# Altium PCB 110-00315-D_B1-DevKit.PcbDoc (part 2 of 9)
Units mil, origin at the board's own origin, x right, y up, seen from the top; angles counter-clockwise.
Board outline 5199.57 x 2702 mil, 8 copper layers (Top Layer, Layer 2-GND-Plane, Layer 3, Layer 4, Layer 5, Layer 6, Layer 7-PWR-Plane, Bottom Layer), stack 60.866 mil thick; 418 components, 298 nets, 1591 pads, 1631 vias.
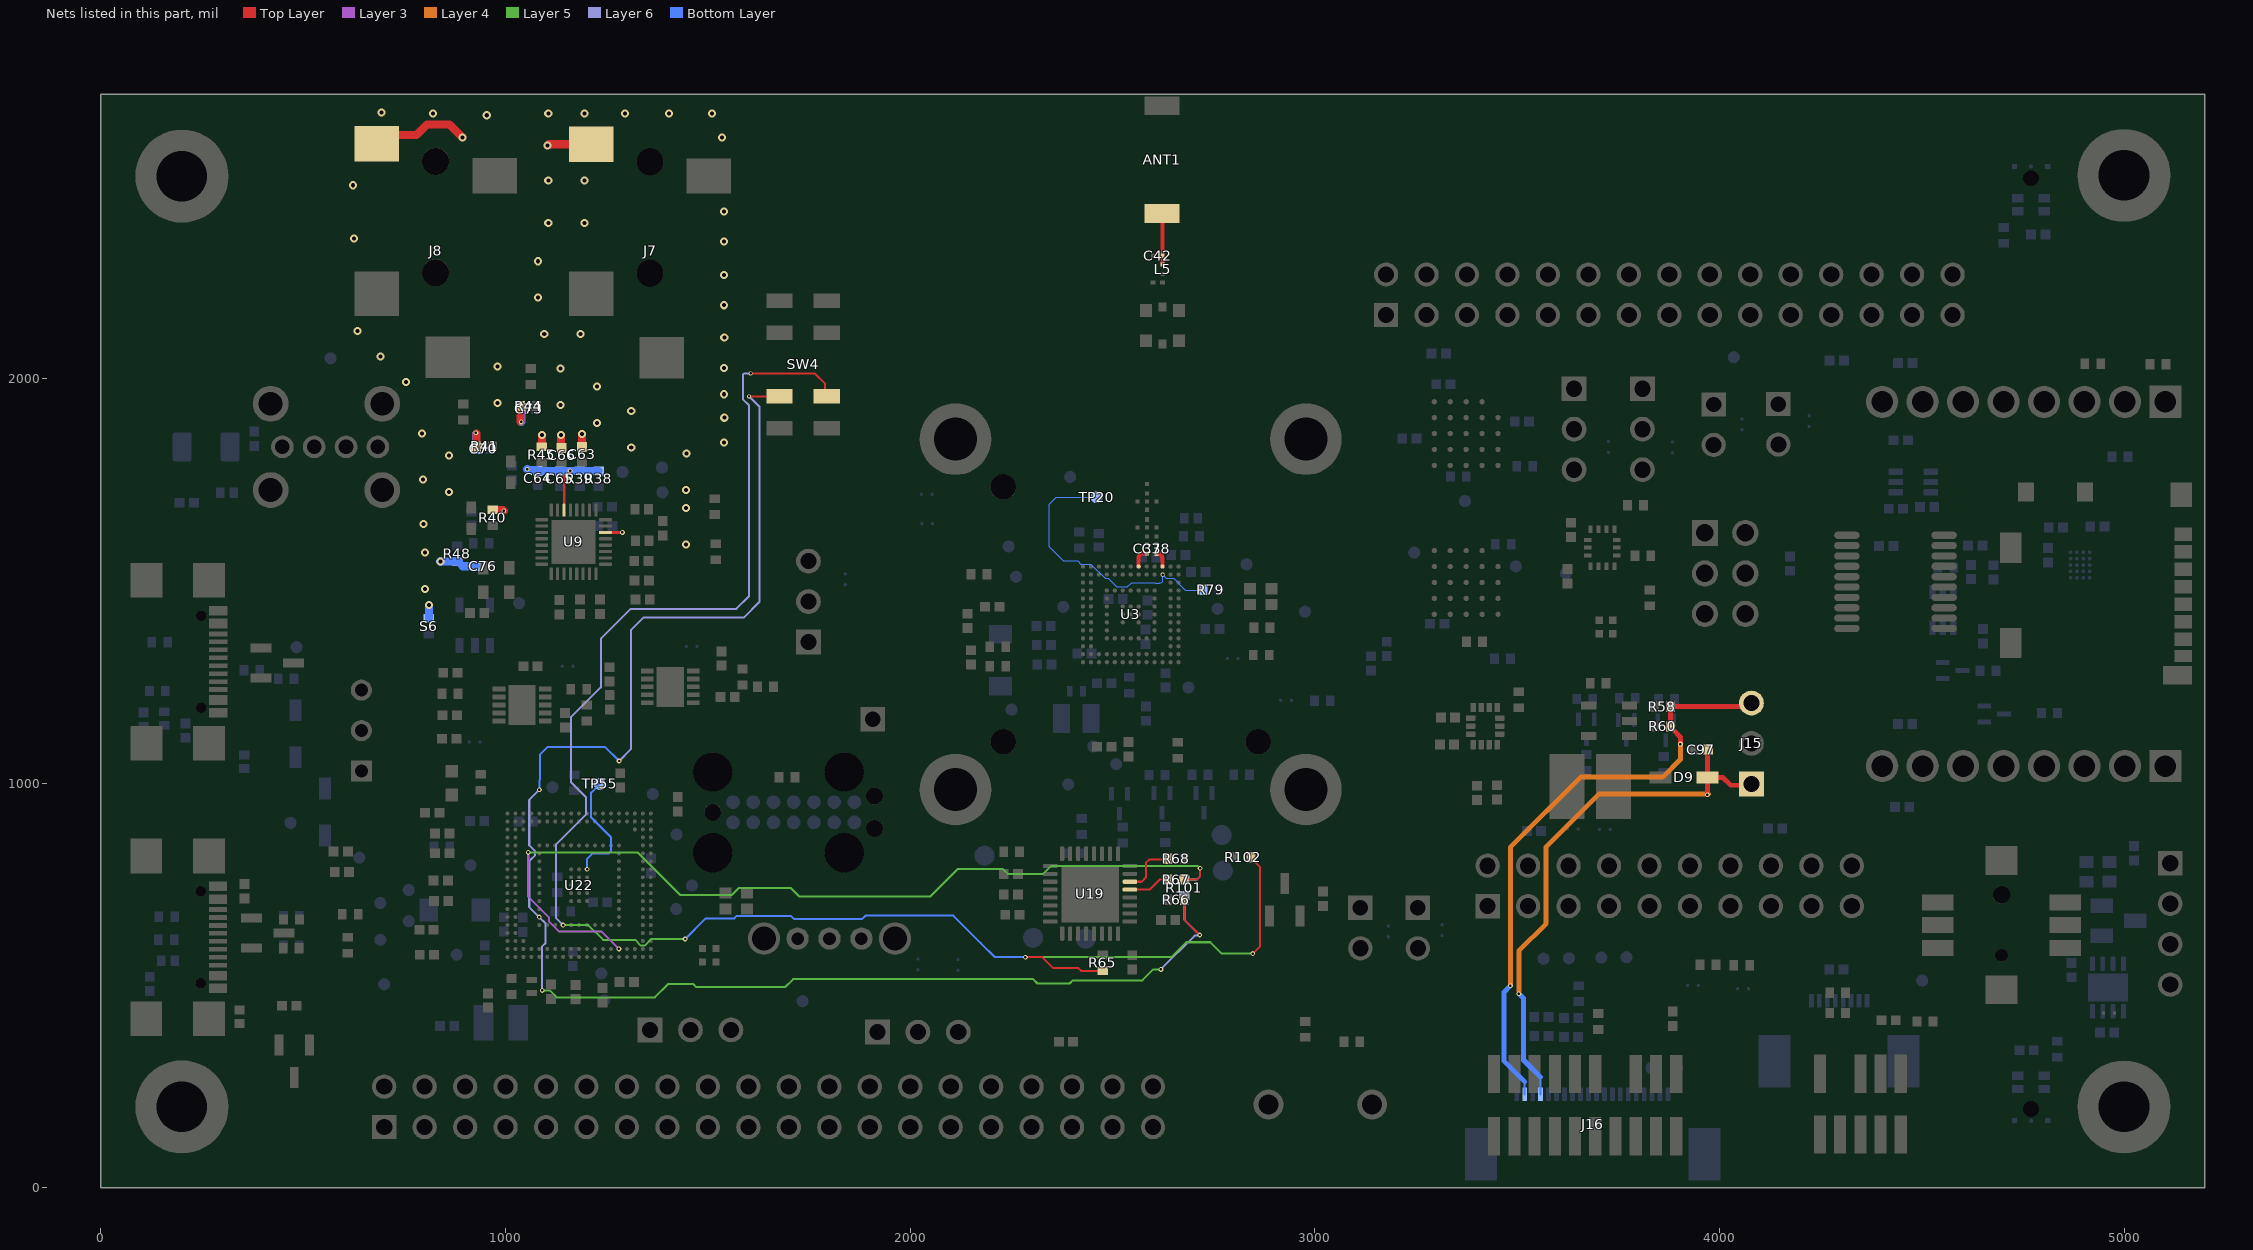
[diagram p8: the nets of this part, all layers, seen from the top]

## Footprints (in the part's own frame and the unit in brackets; to place one, negate y for a bottom-side part, rotate by r counter-clockwise, add the part's x,y. Pads: shape width x height; smd on the part's side, far side on the other; paste and mask are expansions set on the pad) (continued)
MIC_T5838#1 [mil]
  round 39 / inner round 0 / far side round 30 hole 39 unplated mask+4: 0(0,0)
  rect 20.55x28.54 smd: 1(-81.65,-32.99) 2(-49.29,-32.99) 6(-49.29,32.99) 7(-81.65,32.99)
  round 10 smd paste-2 mask+0: 3(29.54,-0.41)
  rect 13x13 smd: 4(29,-41) 5(29,41)
  Top Layer circle w12: c0,0 r30
  Top Layer lines w5: -8.34,-25.68 cw(c0,0) -25.68,-8.34 ; 8.34,-25.68 ccw(c0,0) 25.68,-8.34 ; -25.68,8.34 cw(c0,0) -8.34,25.68 ; 25.68,8.34 ccw(c0,0) 8.34,25.68
  silkscreen extent -103,-70 49,58, body extent -97,-52 41,52, height 38
MIC_T5838#2 [mil]
  round 39 / inner round 0 / far side round 30 hole 39 unplated mask+4: 0(0,0)
  rect 20.55x28.54 smd: 1(-81.65,-32.99) 2(-49.29,-32.99) 6(-49.29,32.99) 7(-81.65,32.99)
  round 10 smd paste-2 mask+0: 3(29.54,-0.41)
  rect 13x13 smd: 4(29,-41) 5(29,41)
  Top Layer lines w5: 8.34,25.68 cw(c0,0) 25.68,8.34 ; -8.34,25.68 ccw(c0,0) -25.68,8.34 ; 25.68,-8.34 cw(c0,0) 8.34,-25.68 ; -25.68,-8.34 ccw(c0,0) -8.34,-25.68
  Top Layer lines w12: 30,-0.41 cw(c0,0) 0,-30 cw(c0,0) 30,-0.41
  silkscreen extent -103,-70 49,58, body extent -97,-52 41,52, height 38
OSC_4p_2016_XRCGB38M400F2P00R0 [mm]
  rect 0.7x0.75 smd: 1(-0.5,0.675) 2(-0.5,-0.675) 3(0.5,-0.675) 4(0.5,0.675)
  silkscreen extent -0.91,-0.1 0.91,1.37, body extent -0.8,-1 0.8,1, height 0.7
OSC_4P_3225_1210_uChip_DSC1001DL5 [mm]
  rect 0.85x0.65 smd: 1(-0.775,0.825) 2(-0.775,-0.825) 3(0.775,-0.825) 4(0.775,0.825)
  silkscreen extent -1.14,-0.3 1.14,1.48, body extent -1.02,-1.24 1.02,1.24, height 0.94
PAD_RF10x10#1 [mil] "SMD Ghost Pad, 10mil^2"
  rect 10x10 smd: 1(0,0.3)
PAD_RF10x10#2 [mil] "SMD Ghost Pad, 10mil^2"
  rect 10x10 smd: 1(0,0)
PQFN50P250X300X88-14N [mm]
  rrect25% 0.59x0.35 smd: 1(-1.165,0.75) 2(-1.165,0.25) 3(-1.165,-0.25) 4(-1.165,-0.75) 8(1.165,-0.75) 9(1.165,-0.25) 10(1.165,0.25) 11(1.165,0.75)
  rrect25% 0.35x0.59 smd: 5(-0.5,-0.915) 6(0,-0.915) 7(0.5,-0.915) 12(0.5,0.915) 13(0,0.915) 14(-0.5,0.915)
  silkscreen extent -2.1,-1.25 1.5,1.25, body extent -1.5,-1.25 1.5,1.25, height 0.88
QFN32_5x5x1-0p5_INF-M_no3D [mil]
  rrect50% 36x10 smd paste+0: 1(-98.5,68.9) 2(-98.5,49.21) 3(-98.5,29.53) 4(-98.5,9.84) 5(-98.5,-9.84) 6(-98.5,-29.53) 7(-98.5,-49.21) 8(-98.5,-68.9) 17(98.5,-68.9) 18(98.5,-49.21) 19(98.5,-29.53) 20(98.5,-9.84) 21(98.5,9.84) 22(98.5,29.53) 23(98.5,49.21) 24(98.5,68.9)
  rrect50% 10x36 smd paste+0: 9(-68.9,-98.5) 10(-49.21,-98.5) 11(-29.53,-98.5) 12(-9.84,-98.5) 13(9.84,-98.5) 14(29.53,-98.5) 15(49.21,-98.5) 16(68.9,-98.5) 25(68.9,98.5) 26(49.21,98.5) 27(29.53,98.5) 28(9.84,98.5) 29(-9.84,98.5) 30(-29.53,98.5) 31(-49.21,98.5) 32(-68.9,98.5)
  rect 142x142 smd paste-70.5 mask+0: 33(0,0)
  silkscreen extent -140,-106 106,106
QFN40P400X400X80-33N [mm]
  rrect50% 0.8x0.2 smd: 1(-2,1.4) 2(-2,1) 3(-2,0.6) 4(-2,0.2) 5(-2,-0.2) 6(-2,-0.6) 7(-2,-1) 8(-2,-1.4) 17(2,-1.4) 18(2,-1) 19(2,-0.6) 20(2,-0.2) 21(2,0.2) 22(2,0.6) 23(2,1) 24(2,1.4)
  rrect50% 0.2x0.8 smd: 9(-1.4,-2) 10(-1,-2) 11(-0.6,-2) 12(-0.2,-2) 13(0.2,-2) 14(0.6,-2) 15(1,-2) 16(1.4,-2) 25(1.4,2) 26(1,2) 27(0.6,2) 28(0.2,2) 29(-0.2,2) 30(-0.6,2) 31(-1,2) 32(-1.4,2)
  rect 2.75x2.75 smd: 33(0,0)
  silkscreen extent -2.82,-2.18 2.21,2.21, body extent -2.05,-2.05 2.05,2.05, height 0.8
RC0201_RF10 [mil] "SMD Multilayer Ceramic Resistor body 0.60x0.30mm, 10mil wide pad"
  rect 10x10 smd: 1(-11.81,0) 2(11.81,0)
  silkscreen extent 0,-5 0,5, body extent -12,-5 12,5, height 13
RESC0402-01 [mm] "Chip Resistor, Body 1.0x0.5mm, IPC Medium Density"
  rect 0.55x0.65 smd: 1(-0.5,0) 2(0.5,0)
  silkscreen extent -0.51,-0.51 0.51,0.51, body extent -0.52,-0.27 0.53,0.28, height 0.4
RESC0603-01 [mil]
  rect 28.94x33.94 smd: 1(-24.23,0) 2(24.23,0)
  silkscreen extent -20,-25 20,25, body extent -31,-17 31,17, height 20
RESC3216X125N_1206 [mm]
  rrect25% 1.2x1.82 smd: 1(-1.505,0) 2(1.505,0)
  silkscreen extent -1.63,-1.09 1.63,1.09, body extent -1.52,-0.84 1.54,0.84, height 1.65
RHDR8W80P0X254_1X8_2082X254X850P [mm]
  rect 2.025x2.025 hole 1.35: 1(0,0)
  round 2.025 hole 1.35: 2(2.54,0) 3(5.08,0) 4(7.62,0) 5(10.16,0) 6(12.7,0) 7(15.24,0) 8(17.78,0)
  silkscreen extent -1.78,-1.52 19.65,1.46, body extent -1.49,-1.19 19.33,1.35, height 8.5
SAMTEC_FTSH-105-01-DV-007-K [mm]
  rect 0.76x2.4 smd: 1(-2.54,-1.905) 2(-2.54,1.905) 3(-1.27,-1.905) 4(-1.27,1.905) 5(0,-1.905) 6(0,1.905) 8(1.27,1.905) 9(2.54,-1.905) 10(2.54,1.905)
  silkscreen extent -6.6,-4.02 6.6,3, body extent -3.14,-2.92 3.14,2.92, height 6.12
SAMTEC_FTSH-110-01-X-DV-007-K [mm]
  rect 0.76x2.4 smd: 1(-5.715,-1.95) 2(-5.715,1.95) 3(-4.445,-1.95) 4(-4.445,1.95) 5(-3.175,-1.95) 6(-3.175,1.95) 8(-1.905,1.95) 9(-0.635,-1.95) 10(-0.635,1.95) 11(0.635,-1.95) 12(0.635,1.95) 13(1.905,-1.95) 14(1.905,1.95) 15(3.175,-1.95) 16(3.175,1.95) 17(4.445,-1.95) 18(4.445,1.95) 19(5.715,-1.95) 20(5.715,1.95)
  silkscreen extent -9.7,-4.02 9.6,3, body extent -6.35,-2.92 6.35,2.92, height 6.1
SC75_SSM_TOS-L [mm]
  rect 0.3x0.856 smd paste+0: 1(-0.5,-0.624) 2(0.5,-0.624) 3(0,0.624)
  silkscreen extent -0.93,-0.61 0.93,0.53, body extent -0.8,-0.8 0.8,0.8, height 0.75
SOD123F_NXP [mil]
  rect 54x30 smd paste+0 mask+4: 1(-58,0) 2(58,0)
  silkscreen extent -85,-38 58,38, body extent -71,-34 71,34, height 47
Solderbridge_Shorted#1 [mm]
  round 0.2 smd paste-10: 1(-0.338,0) 2(0.338,0)
  Top Layer region: -0.102,-0.432 -0.178,-0.505 -0.296,-0.467 -0.361,-0.424 -0.434,-0.351 -0.488,-0.292 -0.546,-0.193 -0.574,-0.099 -0.569,0.122 -0.544,0.193 -0.46,0.33 -0.376,0.411 -0.284,0.469 -0.183,0.5 -0.132,0.483 -0.102,0.43
  Top Layer region: 0.102,0.432 0.178,0.505 0.296,0.467 0.361,0.424 0.434,0.351 0.488,0.292 0.546,0.193 0.574,0.099 0.569,-0.122 0.544,-0.193 0.46,-0.33 0.376,-0.411 0.284,-0.469 0.183,-0.5 0.132,-0.483 0.102,-0.43
  Top Layer lines w0.152: -0.178,0.431 ccw(c-0.068,0) -0.178,-0.431 ; 0.178,0.431 cw(c0.068,0) 0.178,-0.431
  Top Layer lines w0.203: -0.338,0 0.338,0
  silkscreen extent -0.71,-0.71 0.71,0.71
Solderbridge_Shorted#2 [mm]
  round 0.2 smd paste-10: 1(-0.338,0) 2(0.338,0)
  Top Layer region: 0.102,0.432 0.178,0.505 0.296,0.467 0.361,0.424 0.434,0.351 0.488,0.292 0.546,0.193 0.574,0.099 0.569,-0.122 0.544,-0.193 0.46,-0.33 0.376,-0.411 0.284,-0.469 0.183,-0.5 0.132,-0.483 0.102,-0.43
  Top Layer region: -0.102,-0.432 -0.178,-0.505 -0.296,-0.467 -0.361,-0.424 -0.434,-0.351 -0.488,-0.292 -0.546,-0.193 -0.574,-0.099 -0.569,0.122 -0.544,0.193 -0.46,0.33 -0.376,0.411 -0.284,0.469 -0.183,0.5 -0.132,0.483 -0.102,0.43
  Top Layer lines w0.152: 0.178,0.431 cw(c0.068,0) 0.178,-0.431
  Top Layer lines w0.203: 0.338,0 -0.338,0
  silkscreen extent -0.71,-0.71 0.71,0.71
SOT363_DIO [mil]
  rect 35.5x16 smd paste+0 mask+0: 1(-44.25,25.59) 2(-44.25,0) 3(-44.25,-25.59) 4(44.25,-25.59) 5(44.25,0) 6(44.25,25.59)
  silkscreen extent -65,-48 32,55, body extent -48,-44 48,44, height 43
SOT363_TI [mm] "6-TSSOP, SC-88, SOT-363"
  rrect25% 0.9x0.4 smd paste+0 mask+0: 1(-1.1,0.65) 2(-1.1,0) 3(-1.1,-0.65) 4(1.1,-0.65) 5(1.1,0) 6(1.1,0.65)
  silkscreen extent -2.03,-1.17 0.63,1.17, body extent -1.05,-1 1.05,1, height 1.1
SOT-23_DBZ_TEX [mil]
  rect 22x52 smd paste+0 mask+0: 1(-37.4,-40) 2(37.4,-40) 3(0,40)
  silkscreen extent -65,-33 65,33, body extent -60,-52 60,52, height 44
SW_1825966-TL1107-1 [mm]
  round 1.875 hole 1.25: 1(-3.25,0) 2(3.25,0)
  silkscreen extent -3,-1.75 3,1.75, body extent -3.9,-1.78 4,1.72, height 4.7
SW_450301014042_WRE [mil]
  round 52 / inner round 60 / far side round 52 hole 32 paste-99999 mask+0: 1(0,-100) 2(0,-200)
  rect 52x52 / inner round 60 / far side rect 52x52 hole 32 paste-99999 mask+0: 3(0,0)
  silkscreen extent -75,-302 54,102, body extent -50,-297 48,97, height 252
SW_CL-SB-23A-01_NDC-M [mil]
  rect 65x36 smd paste+0: 1(-58.5,157.48) 2(-58.5,78.74) 3(-58.5,-78.74) 4(-58.5,-157.48) 5(58.5,157.48) 6(58.5,78.74) 7(58.5,-78.74) 8(58.5,-157.48)
  silkscreen extent -114,-260 74,260, body extent -69,-236 69,236, height 217
SW_JS1400BFQ [mm]
  rect 2x1 smd: 1(-4,1.425) 2(-4,0) 3(-4,-1.425) 4(4,1.425) 5(4,0) 6(4,-1.425)
  rect 2x1.8 smd: SH1(0,4.05) SH2(0,-4.05)
  round 0.8 hole 0.8 unplated: ""(0,1.9)
  round 1.1 hole 1.1 unplated: ""(0,-1.9)
  silkscreen extent -3.85,-3.7 3.85,3.7, body extent -4.5,-3.9 4.5,3.9, height 4.99
SW_SPDT_OS10201MSQN1 [mil] "Switch, SPDT slide, PCB vertical, 5 pin"
  round 55 hole 31: 1(-79,0) 2(0,0) 3(79,0)
  round 80 hole 59: 4(-162,0) 5(162,0)
  silkscreen extent -177,-109 176,90, body extent -168,-86 170,84, height 353
TC2070-IDC [mil]
  round 34 smd paste-42: 1(-150,-25) 2(-100,-25) 3(-50,-25) 4(0,-25) 5(50,-25) 6(100,-25) 7(150,-25) 8(150,25) 9(100,25) 10(50,25) 11(0,25) 12(-50,25) 13(-100,25) 14(-150,25)
  round 96.5 hole 96.5 unplated: 15(-200,100) 17(-200,-100) 18(125,-100) 21(125,100)
  round 42 hole 42 unplated: 16(-200,0) 19(200,-39.96) 20(200,39.96)
  silkscreen extent -249,-102 245,98
TP_30_RND [mil]
  round 30 smd paste-15: 1(0,0)
  silkscreen extent -22,-22 22,22
TP_50_RND [mil]
  round 50 smd paste-25: 1(0,0)
  silkscreen extent -32,-32 32,32
TSOT23-5_ONS [mil]
  rect 37.5x20 smd paste+0 mask+4: 1(-50.25,37.4) 2(-50.25,0) 3(-50.25,-37.4) 4(50.25,-37.4) 5(50.25,37.4)
  silkscreen extent -65,-62 37,75, body extent -55,-57 55,57, height 39
TSSOP20_TI_PW0020A_M [mm]
  oval 1.6x0.45 smd paste+0 mask+0.051: 1(-3.05,2.925) 2(-3.05,2.275) 3(-3.05,1.625) 4(-3.05,0.975) 5(-3.05,0.325) 6(-3.05,-0.325) 7(-3.05,-0.975) 8(-3.05,-1.625) 9(-3.05,-2.275) 10(-3.05,-2.925) 11(3.05,-2.925) 12(3.05,-2.275) 13(3.05,-1.625) 14(3.05,-0.975) 15(3.05,-0.325) 16(3.05,0.325) 17(3.05,0.975) 18(3.05,1.625) 19(3.05,2.275) 20(3.05,2.925)
  silkscreen extent -4.44,-3.43 1.92,3.45, body extent -3.2,-3.25 3.2,3.25, height 1.2
UDFN3030-10_SON50P300X300X63-11N [mm] "Diodes Inc U-DFN3030-10"
  rect 0.8x0.3 smd: 1(-1.45,1) 2(-1.45,0.5) 3(-1.45,0) 4(-1.45,-0.5) 5(-1.45,-1) 6(1.45,-1) 7(1.45,-0.5) 8(1.45,0) 9(1.45,0.5) 10(1.45,1)
  rect 1.7x2.5 smd: 11(0,0)
  silkscreen extent -2.11,-1.63 1.5,1.63, body extent -1.55,-1.5 1.55,1.5, height 0.63
WE-TVS_SOT23-3L [mm] "TVS Diode, package SOT23-3L"
  rect 0.9x1.4 smd: 1(-0.95,-1.05) 2(0.95,-1.05) 3(0,1.05)
  silkscreen extent -1.45,-0.65 1.45,0.65, body extent -1.45,-1.2 1.45,1.2, height 1.04
WLCSP20_NVT4857_NXP [mil]
  round 9 smd paste+0 mask+0: A1(-23.62,31.5) A2(-7.87,31.5) A3(7.87,31.5) A4(23.62,31.5) B1(-23.62,15.75) B2(-7.87,15.75) B3(7.87,15.75) B4(23.62,15.75) C1(-23.62,0) C2(-7.87,0) C3(7.87,0) C4(23.62,0) D1(-23.62,-15.75) D2(-7.87,-15.75) D3(7.87,-15.75) D4(23.62,-15.75) E1(-23.62,-31.5) E2(-7.87,-31.5) E3(7.87,-31.5) E4(23.62,-31.5)
  silkscreen extent -56,-47 39,47, body extent -34,-42 34,42, height 21
XTAL_ABS07_ABR-M [mil]
  rect 46x57 smd paste+0: 1(-64,0) 2(64,0)
  silkscreen extent -29,-33 29,33, body extent -65,-27 65,27, height 35

## Part data
ANT1: library part ANT_2450AT43A100, "Antenna, Chip, 2.4GHz Bluetooth, ISM, Wi-Fi,  2.7dBi", Manufacturer 1=Johanson, Manufacturer Part Number 1=2450AT43A0100001E, Package=None, Check_prices=https://www.snapeda.com/parts/ACAG0201-2450-T/Abracon+LLC/view-part/?ref=eda, SnapEDA_Link=https://www.snapeda.com/parts/ACAG0201-2450-T/Abracon+LLC/view-part/?ref=snap
C1 C3 C8 C9 C14 C18 C20 C27 C28 C31 C32 C71 C72 C75 C110 C120 C123 C130 C135 C136 C137 C138 C140 C141 C142: "Cap,1.0uF,20%,25V,X5R,0402", Manufacturer 1=TDK, Manufacturer 2=Yageo, Manufacturer 3=Murata, Manufacturer Part Number 1=CGB2A1X5R1E105K033BC, Manufacturer Part Number 2=CC0402KRX5R8BB105, Manufacturer Part Number 3=GRM155R61E105KA12D, Tolerance=10%, Voltage=25V, LatestRevisionDate=17-Jul-2002, LatestRevisionNote="Re-released for DXP Platform.", Max_Height=0.60mm, PackageDescription="Radial Cap, Thru-Hole; 2 Leads; 0.3 in Pin Spacing", PackageReference=RAD-0.3, PCB_Footprint=CC0402, Published=8-Jun-2000, Publisher="Altium Limited", Type=X5R
C2 C7 C13 C34: "Cap,10nF,10%,50V,X7R,0402", Manufacturer 1=TDK, Manufacturer 2=Samsung, Manufacturer 3=Walsin, Manufacturer Part Number 1=CGA2B3X7R1H103K050BE, Manufacturer Part Number 2=CL05B103KB5NNNC, Manufacturer Part Number 3=0402B103K500CT, Tolerance=10%, Voltage=50V, LatestRevisionDate=17-Jul-2002, LatestRevisionNote="Re-released for DXP Platform.", Max_Height=0.60mm, PackageDescription="Radial Cap, Thru-Hole; 2 Leads; 0.3 in Pin Spacing", PackageReference=RAD-0.3, PCB_Footprint=CC0402, Published=8-Jun-2000, Publisher="Altium Limited", Type=X7R
C4 C10 C17 C19 C43 C76 C96 C99 C121 C144: "Cap,10uF,20%,10V,X5R,0402", Manufacturer 1=AVX, Manufacturer 2=Samsung, Manufacturer 3=Venkel, Manufacturer Part Number 1=0402ZD106MAT2A, Manufacturer Part Number 2=CL05A106MP5NUNC, Manufacturer Part Number 3=C0402X5R100-106MNP, Tolerance=10%, Voltage=10V, LatestRevisionDate=17-Jul-2002, LatestRevisionNote="Re-released for DXP Platform.", Max_Height=0.60mm, PackageDescription="Radial Cap, Thru-Hole; 2 Leads; 0.3 in Pin Spacing", PackageReference=RAD-0.3, PCB_Footprint=CC0402, Published=8-Jun-2000, Publisher="Altium Limited", Type=X5R
C5 C11: "Cap,680pF,5%,50V,C0G,0402", Manufacturer 1=TDK, Manufacturer 2=Samsung, Manufacturer 3=Walsin, Manufacturer Part Number 1=CGA2B2NP01H681J050BA, Manufacturer Part Number 2=CL05C681JB5NNNC, Manufacturer Part Number 3=0402N681J500CT, Tolerance=5%, Voltage=50V, LatestRevisionDate=17-Jul-2002, LatestRevisionNote="Re-released for DXP Platform.", Max_Height=0.60mm, PackageDescription="Radial Cap, Thru-Hole; 2 Leads; 0.3 in Pin Spacing", PackageReference=RAD-0.3, PCB_Footprint=CC0402, Published=8-Jun-2000, Publisher="Altium Limited", Type=C0G
C6 C12 C24 C53 C54 C59 C67 C68 C85 C94 C100 C103 C113 C116 C119: "Cap,2.2uF,20%,25V,X5R,0402", Manufacturer 1=TDK, Manufacturer 2=Murata, Manufacturer Part Number 1=C1005X5R1E225M050BC, Manufacturer Part Number 2=GRM155R61E225ME11D, Manufacturer Part Number 3=GRM155R61E225ME15D, Tolerance=20%, Voltage=25V, LatestRevisionDate=17-Jul-2002, LatestRevisionNote="Re-released for DXP Platform.", Manufacturer 3=Murata, Max_Height=0.60mm, PackageDescription="Radial Cap, Thru-Hole; 2 Leads; 0.3 in Pin Spacing", PackageReference=RAD-0.3, PCB_Footprint=CC0402, Published=8-Jun-2000, Publisher="Altium Limited", Type=X5R
C21 C22 C25 C26 C29 C30 C33 C44 C45 C46 C47 C48 C49 C50 C51 C52 C55 C56 C57 C61 C62 C64 C77 C78 C79 C80 C81 C82 C83 C84 C87 C88 C89 C90 C91 C92 C93 C98 C101 C102 C111 C112 C114 C115 C117 C118 C122 C124 C125 C126 C127 C128 C129 C131 C132 C133 C134 C139 C143: "Cap,100nF,10%,50V,X7R,0402", Manufacturer 1=TDK, Manufacturer 2=Samsung, Manufacturer 3=Walsin, Manufacturer Part Number 1=C1005X7R1H104K050BE, Manufacturer Part Number 2=CL05B104KB54PNC, Manufacturer Part Number 3=0402B104K500CT, Tolerance=10%, Voltage=50V, LatestRevisionDate=17-Jul-2002, LatestRevisionNote="Re-released for DXP Platform.", Max_Height=0.60mm, PackageDescription="Radial Cap, Thru-Hole; 2 Leads; 0.3 in Pin Spacing", PackageReference=RAD-0.3, PCB_Footprint=CC0402, Published=8-Jun-2000, Publisher="Altium Limited", Type=X7R
C23 C106: "DNI,Cap,1.0uF,20%,25V,X5R,0402", Manufacturer 1=TDK, Manufacturer 2=Yageo, Manufacturer 3=Murata, Manufacturer Part Number 1=CGB2A1X5R1E105K033BC, Manufacturer Part Number 2=CC0402KRX5R8BB105, Manufacturer Part Number 3=GRM155R61E105KA12D, Tolerance=10%, Voltage=25V, LatestRevisionDate=17-Jul-2002, LatestRevisionNote="Re-released for DXP Platform.", Max_Height=0.60mm, PackageDescription="Radial Cap, Thru-Hole; 2 Leads; 0.3 in Pin Spacing", PackageReference=RAD-0.3, PCB_Footprint=CC0402, Published=8-Jun-2000, Publisher="Altium Limited", Type=X5R
C37: library part Cap_SMT, "Cap,4.0pF,+-0.05pF,>=25V,C0G,0201", Manufacturer 1=MuRata, Manufacturer 2=Kemet, Manufacturer Part Number 1=GJM0335C1E4R0WB01D, Manufacturer Part Number 2=CBR02C409A5GAC, Tolerance=0p05, Voltage=25V, LatestRevisionDate=17-Jul-2002, LatestRevisionNote="Re-released for DXP Platform.", Max_Height=0.60mm, PackageDescription="Radial Cap, Thru-Hole; 2 Leads; 0.3 in Pin Spacing", PackageReference=RAD-0.3, PCB_Footprint=0201, Published=8-Jun-2000, Publisher="Altium Limited", Type=C0G
C38: library part Cap_SMT, "Cap,16pF,1%,50V,C0G,0201", Manufacturer 1=MuRata, Manufacturer 2=Kemet, Manufacturer Part Number 1=GCM0335C1H160FA16J, Manufacturer Part Number 2=CBR02C160F8GAC, Tolerance=1%, Voltage=25V, LatestRevisionDate=17-Jul-2002, LatestRevisionNote="Re-released for DXP Platform.", Max_Height=0.60mm, PackageDescription="Radial Cap, Thru-Hole; 2 Leads; 0.3 in Pin Spacing", PackageReference=RAD-0.3, PCB_Footprint=0201, Published=8-Jun-2000, Publisher="Altium Limited", Type=C0G
C39: library part Cap_SMT, "Cap,2.2pF,+-0.05pF,>25V,C0G,0201", Manufacturer 1=MuRata, Manufacturer 2=Kemet, Manufacturer Part Number 1=GJM0335C1E2R2WB01D, Manufacturer Part Number 2=CBR02C229A5GAC, Tolerance=0p05, Voltage=25V, LatestRevisionDate=17-Jul-2002, LatestRevisionNote="Re-released for DXP Platform.", Max_Height=0.60mm, PackageDescription="Radial Cap, Thru-Hole; 2 Leads; 0.3 in Pin Spacing", PackageReference=RAD-0.3, PCB_Footprint=0201, Published=8-Jun-2000, Publisher="Altium Limited", Type=C0G
C40: library part Cap_SMT, "Cap,2.0pF,+-0.05pF,>25V,C0G,0201", Manufacturer 1=MuRata, Manufacturer 2=Yageo, Manufacturer Part Number 1=GJM0335C1E2R0WB01D, Manufacturer Part Number 2=CQ0201ARNPO9BN2R0, Tolerance=0p05, Voltage=25V, LatestRevisionDate=17-Jul-2002, LatestRevisionNote="Re-released for DXP Platform.", Max_Height=0.60mm, PackageDescription="Radial Cap, Thru-Hole; 2 Leads; 0.3 in Pin Spacing", PackageReference=RAD-0.3, PCB_Footprint=0201, Published=8-Jun-2000, Publisher="Altium Limited", Type=C0G
C41: "Ind,13nH,+-3%,>300mA,ESR < 800mOhm,SRF >4.3GHz,Q >12 @ 500MHz,0201", Manufacturer 1=MuRata, Manufacturer 3=Abracon, Manufacturer Part Number 1=LQP03TN13NH02D, Manufacturer Part Number 2=LQP03HQ13NH02D, Manufacturer Part Number 3=AIMC-Q0201HQ-13NH-T, RMS_Current=250mA, Tolerance=3%, Code_IEC=0201, Code_JEITA=0201, DCR=800m, LatestRevisionDate=29-May-2009, LatestRevisionNote="IPC-7351 Footprint Added.", Manufacturer 2=MuRata, Max_Height=0.45mm, PackageDescription="Chip Inductor", PackageReference=0402-A, PCB_Footprint=0201, Published=8-Jun-2000, Publisher="Altium Limited"
C42: library part Cap_SMT, "DNI,Cap,tbd,tbd,>25V,C0G,0201", Tolerance=tbd, Voltage=25V, LatestRevisionDate=17-Jul-2002, LatestRevisionNote="Re-released for DXP Platform.", Max_Height=0.60mm, PackageDescription="Radial Cap, Thru-Hole; 2 Leads; 0.3 in Pin Spacing", PackageReference=RAD-0.3, PCB_Footprint=0201, Published=8-Jun-2000, Publisher="Altium Limited", Type=C0G
C58: "Cap,100pF,5%,25V,C0G,Hi-Q,0402", Manufacturer 1=Kemet, Manufacturer 3=Walsin, Manufacturer Part Number 1=CBR04C101J3GAC, Manufacturer Part Number 2=CBR04C101G3GAC, Manufacturer Part Number 3=RF15N101J250CT, Tolerance=5%, Voltage=25V, LatestRevisionDate=17-Jul-2002, LatestRevisionNote="Re-released for DXP Platform.", Manufacturer 2=Kemet, Max_Height=0.60mm, PackageDescription="Radial Cap, Thru-Hole; 2 Leads; 0.3 in Pin Spacing", PackageReference=RAD-0.3, PCB_Footprint=CC0402, Published=8-Jun-2000, Publisher="Altium Limited", Type=C0G
C60 C63 C65 C66 C86: library part Cap_225M25VX5R0402_1, "Cap,4.7uF,20%,10V,X5R,0402", Manufacturer 1=TDK, Manufacturer 2=Kyocera, Manufacturer 3=Samsung, Manufacturer Part Number 1=C1005X5R1A475K050BC, Manufacturer Part Number 2=0402YD475MAT2A, Manufacturer Part Number 3=CL05A475MP5NRNC, Tolerance=20%, Voltage=10V, LatestRevisionDate=17-Jul-2002, LatestRevisionNote="Re-released for DXP Platform.", Max_Height=0.60mm, PackageDescription="Radial Cap, Thru-Hole; 2 Leads; 0.3 in Pin Spacing", PackageReference=RAD-0.3, PCB_Footprint=CC0402, Published=8-Jun-2000, Publisher="Altium Limited", Type=X5R
C69 C74: "Cap, Tant, 10uF, 6V3-10V, 10%-20%, 0603", Case Size/Dimension=T0603, Lifetime@Temperature=4000Hrs@105degC, Manufacturer 1=Kyocera, Manufacturer 3=Vishay, Manufacturer Part Number 1=TACL106M010XTA, Manufacturer Part Number 3=298D106X06R3M2T, Operating Temp Range=-40to+105degC, Ripple Current=1650mA, Impedance=0.03O, Manufacturer 2=Kyocera, Manufacturer Part Number 2=TACL106M010XTA, Type=Radial
C70 C73: "Cap,220pF,5%,50V,C0G,0402", Manufacturer 1=MuRata, Manufacturer 2=Kemet, Manufacturer 3=TDK, Manufacturer Part Number 1=GRM1555C1H221JA01D, Manufacturer Part Number 2=C0402C221J5GACTU, Manufacturer Part Number 3=C1005C0G1H221J050BA, Tolerance=5%, Voltage=50V, LatestRevisionDate=17-Jul-2002, LatestRevisionNote="Re-released for DXP Platform.", Max_Height=0.60mm, PackageDescription="Radial Cap, Thru-Hole; 2 Leads; 0.3 in Pin Spacing", PackageReference=RAD-0.3, PCB_Footprint=CC0402, Published=8-Jun-2000, Publisher="Altium Limited", Type=C0G
C95: "Cap,4.7nF,10%,100V,X7R,0402", Manufacturer 1=MuRata, Manufacturer 2=Wurth, Manufacturer 3=Vishay, Manufacturer Part Number 1=GCM155R72A472KA37D, Manufacturer Part Number 2=885012205084, Manufacturer Part Number 3=VJ0402Y472KXBAC, Tolerance=10%, Voltage=100V, LatestRevisionDate=17-Jul-2002, LatestRevisionNote="Re-released for DXP Platform.", Max_Height=0.60mm, PackageDescription="Radial Cap, Thru-Hole; 2 Leads; 0.3 in Pin Spacing", PackageReference=RAD-0.3, PCB_Footprint=CC0402, Published=8-Jun-2000, Publisher="Altium Limited", Type=X7R
C97: "Cap,470nF,20%,50V,X5R,0402", Manufacturer 1=MuRata, Manufacturer 2=Cal-Chip, Manufacturer Part Number 1=GRM155R61H474ME11D, Manufacturer Part Number 2=GMC04X5R474M50NT, Tolerance=20%, Voltage=50V, LatestRevisionDate=17-Jul-2002, LatestRevisionNote="Re-released for DXP Platform.", Max_Height=0.60mm, PackageDescription="Radial Cap, Thru-Hole; 2 Leads; 0.3 in Pin Spacing", PackageReference=RAD-0.3, PCB_Footprint=CC0402, Published=8-Jun-2000, Publisher="Altium Limited", Type=X7R
C104 C108 C109: "DNI,Cap,100nF,10%,50V,X7R,0402", Manufacturer 1=TDK, Manufacturer 2=Samsung, Manufacturer 3=Walsin, Manufacturer Part Number 1=C1005X7R1H104K050BE, Manufacturer Part Number 2=CL05B104KB54PNC, Manufacturer Part Number 3=0402B104K500CT, Tolerance=10%, Voltage=50V, LatestRevisionDate=17-Jul-2002, LatestRevisionNote="Re-released for DXP Platform.", Max_Height=0.60mm, PackageDescription="Radial Cap, Thru-Hole; 2 Leads; 0.3 in Pin Spacing", PackageReference=RAD-0.3, PCB_Footprint=CC0402, Published=8-Jun-2000, Publisher="Altium Limited", Type=X7R
C105 C107: library part Cap_225M25VX5R0402_1, "DNI,Cap,4.7uF,20%,10V,X5R,0402", Manufacturer 1=TDK, Manufacturer 2=Kyocera, Manufacturer 3=Samsung, Manufacturer Part Number 1=C1005X5R1A475K050BC, Manufacturer Part Number 2=0402YD475MAT2A, Manufacturer Part Number 3=CL05A475MP5NRNC, Tolerance=20%, Voltage=10V, LatestRevisionDate=17-Jul-2002, LatestRevisionNote="Re-released for DXP Platform.", Max_Height=0.60mm, PackageDescription="Radial Cap, Thru-Hole; 2 Leads; 0.3 in Pin Spacing", PackageReference=RAD-0.3, PCB_Footprint=CC0402, Published=8-Jun-2000, Publisher="Altium Limited", Type=X5R
D1 D3: library part "D Zener_2_ComA", "Diode,Zener,Dual,Common Anode", Manufacturer 1=Nexpheria, Manufacturer Part Number 1=PESD2USB5UX-TR, Manufacturer Part Number 2=PESD2USB5UXT-QR, Code_JEDEC=SOT23-3, LatestRevisionDate=17-Jul-2002, LatestRevisionNote="Re-released for DXP Platform.", Manufacturer 2=Nexpheria, PackageDescription=SOT23-3, PackageReference=SOT23-3, Published=8-Jun-2000, Publisher="Altium Limited"
D2 D10: library part "D LED_RGB_CA_1MMc1MM", "Diode,LED,RGB, (@2mA) -> R=10mcd & 1.75V, G = 50mcd & 2.75V, B = 20mcd & 2.95V, 0404(1mm x 1mm)", Manufacturer 1=Lumex, LatestRevisionDate=17-Jul-2002, LatestRevisionNote="Re-released for DXP Platform.", Manufacturer Part Number 1=SML-LX0404SIUPGUSB, PackageDescription="SM LED; 2 Flat Leads", PackageReference=1.0x1.0, PackageVersion=Feb-2002, Published=8-Jun-2000, Publisher="Altium Limited"
D4 D5 D9: "Diode,Schottky,1A,40V,SOD123", Manufacturer 1=ST, Manufacturer 2=Panjit, Manufacturer 3=Nexpheria, Manufacturer Part Number 1=STPS140ZY, Manufacturer Part Number 2=SBA140AS_R1_00001, Manufacturer Part Number 3=PMEG4010EH,115, Code_JEDEC=SOD123, LatestRevisionDate=17-Jul-2002, LatestRevisionNote="Re-released for DXP Platform.", PackageDescription=SOD123, PackageReference=SOD123, Published=8-Jun-2000, Publisher="Altium Limited"
D6: "Diode,LED,Green 573nm,300mcd @ 20mA,0603", Manufacturer 1=Wurth, Manufacturer Part Number 1=150060VS86000, LatestRevisionDate=17-Jul-2002, LatestRevisionNote="Re-released for DXP Platform.", PackageDescription="SM LED; 2 Flat Leads", PackageReference=L0603, PackageVersion=Feb-2002, Published=8-Jun-2000, Publisher="Altium Limited"
D8: library part D_ESD_ESD2CAN24DBZRQ1, "Diode,TVS  – High Speed Series, SOT23-3, 2 Channel, 24Vdc, 12pF", Manufacturer 1=TI, Manufacturer 2=Nexpheria, Manufacturer Part Number 1=ESD2CAN24DBZRQ1, Manufacturer Part Number 2=PESD2CAN24T-QR
F1: library part Fuse_PTC_0ZCJ0050FF2G, "Fuse,Poly PTC,1A,8V,150mOhm,1206", Manufacturer 1=Belfuse, Copyright="Copyright (C) 2022 Ultra Librarian. All rights reserved.", Digi-Key_Part_Number_1=507-1802-1-ND, Digi-Key_Part_Number_2=507-1802-2-ND, Digi-Key_Part_Number_3=507-1802-6-ND, Manufacturer Part Number 1=0ZCJ0050FF2G, Manufacturer_Part_Number=0ZCJ0050FF2G, Mfr_Name=Belfuse, RefDes=RefDes
FB1 FB2 FB3 FB4 FB5 FB10 FB11 FB12: "Ind,WidebandChoke,1.5A,120ohm@100MHz,95mOhm,0402", Manufacturer 1=Murata, Manufacturer Part Number 1=BLM15EG121SN1D, RMS_Current=1.5A, Tolerance=30%, Code_IEC=1005, Code_JEITA=0402, DCR=143m, Impedance=120@100M, LatestRevisionDate=29-May-2009, LatestRevisionNote="IPC-7351 Footprint Added.", Max_Height=0.60mm, PackageDescription="Chip Inductor", PackageReference=0402-A, PCB_Footprint=0402, Published=8-Jun-2000, Publisher="Altium Limited"
FB8: "DNI,Ind,WidebandChoke,1.5A,120ohm@100MHz,95mOhm,0402", Manufacturer 1=Murata, Manufacturer Part Number 1=BLM15EG121SN1D, RMS_Current=1.5A, Tolerance=30%, Code_IEC=1005, Code_JEITA=0402, DCR=143m, Impedance=120@100M, LatestRevisionDate=29-May-2009, LatestRevisionNote="IPC-7351 Footprint Added.", Max_Height=0.60mm, PackageDescription="Chip Inductor", PackageReference=0402-A, PCB_Footprint=0402, Published=8-Jun-2000, Publisher="Altium Limited"
FB9 R23 R86: "Res,10R0,1%,100ppm,0402", Manufacturer 1=Vishay, Manufacturer 2=KOA, Manufacturer 3=Stackpol, Manufacturer Part Number 1=CRCW040210R0FKED, Manufacturer Part Number 2=RK73H1ETTP10R0F, Manufacturer Part Number 3=RMCF0402FT10R0, Tolerance=1%, LatestRevisionDate=29-May-2009, LatestRevisionNote="IPC-7351 Footprint Added.", PackageDescription="Chip Resistor", PackageReference=RESC0402-01, PCB_Footprint=RESC0402-01, Published=8-Jun-2000, Publisher="Altium Limited", Type="Thick Film", Wattage=63mW
H1 H2 H3 H4: "Hole, #4,--not a BOM item--", PCB_Footprint=TP_PAD1
J1: library part Conn_1-1734775-1, "Conn,USB 2.0, Type A Recept,4 Pos, R/A", Manufacturer 1="TE Connectivity", Copyright="Copyright (C) 2022 Ultra Librarian. All rights reserved.", Digi-Key_Part_Number_1=A108852-ND, Manufacturer Part Number 1=1-1734775-1, Manufacturer_Part_Number=1-1734775-1, Mfr_Name="TE Connectivity", RefDes=RefDes, Type=DEV
J2 J3: library part CONN_USB_C_SMT_USB4110GFA, "CONN,USB-C, USB 2.0 Receptacle Connector 24 (16+8 Dummy) Position Surface Mount, Right Angle", Manufacturer 1=GCT, Manufacturer 2=Linkplex, Manufacturer Part Number 2=LUB-C123D-007-G-19, Package=None, Manufacturer Part Number 1=USB4110GFA, SnapEDA_Link=https://www.snapeda.com/parts/USB4110GFA/Global+Connector+Technology/view-part/?ref=snap
J5: library part CONN_U.FL_SWITCH_MM8130-2600, "Conn,U.FL, Switch, Male Pin 50Ohm 6-Pin SMT", Manufacturer 1=MyRata, Manufacturer Part Number 1=MM8130-2600R, Datasheet Link=https://www.te.com/commerce/DocumentDelivery/DDEController?Action=showdoc&DocId=Customer+Drawing%7F2081956%7FA%7Fpdf%7FEnglish%7FENG_CD_2081956_A.pdf%7F2081956-1, Height=1.05mm
J6: library part "Conn_SD_Molex CN-SD-8-2SW-2S", "Conn,Micro SD Card w/ switch, RA, 8-Pin SMD", Current Rating=500mA, Manufacturer 1=Molex, Package Description="8-Pin Surface Mount Device, Body 11.95 x 11.4 mm, Pitch 1.1 mm", voltage rating=10VAC/DC, Brand=Molex, Card Type=microSD, Contact Material=PhosphorBronze, Contact Plating=Gold, Datasheet URL=http://www.molex.com/pdm_docs/sd/1040310811_sd.pdf, Datasheet Version="Rev. E, 04/2006", Height=1.42mm, Housing Material=LiquidCrystalPolymer(LCP), Insertion - Extraction Style=Push-Pull, Length=11.4mm, Manufacturer Part Number 1=104031-0811, Manufacturer URL=http://www.molex.com/, Mating Cycles=10000, Mounting Technology=SurfaceMount, Mounting Type=Standard, Number of Contacts=8, Number of Rows=1Row, Orientation=RightAngle, Package Reference=104031-0811, Packaging=Reel, Pitch=1.1mm, Product=CardConnectors, Product Category=MemoryCardConnectors, RoHS=True, Termination Style=SMD
J7: library part CONN_SJ-3524-SMT-TR-XX, "Conn, Audio Jack, 3.5 mm Low Profile Surface Mount Stereo Jack, 3 Pin Right-Angle, XX = color GREEN", Color=GREEN, Manufacturer 1=CUI, Mfr_Name="CUI Devices", Manufacturer Part Number 1=SJ-3524-SMT-TR-GR, RefDes=RefDes, Type=Type
J8: library part CONN_SJ-3524-SMT-TR-XX, "Conn, Audio Jack, 3.5 mm Low Profile Surface Mount Stereo Jack, 3 Pin Right-Angle, XX = color BLUE", Color=BLUE, Manufacturer 1=CUI, Mfr_Name="CUI Devices", Manufacturer Part Number 1=SJ-3524-SMT-TR-BE, RefDes=RefDes, Type=Type
J9: library part Hdr_M_2X10_2M54_STRT_UNSHROUDED, "Hdr, Male,2x10, 0.1\"x0.1\", Strt,Mate Ht 0.318\",Tail Ht 0.120\",Unshrouded", Manufacturer 1=Sullins, Manufacturer Part Number 1=PRPC010DFAN-RC
J10: library part Hdr_M_2X20_2M54_STRT_UNSHROUDED, "Hdr, Male,2x20, 0.1\"x0.1\", Strt,Mate Ht 0.318\",Tail Ht 0.120\",Unshrouded", Manufacturer 1=Sullins, Manufacturer Part Number 1=PRPC020DFAN-RC, PCB_Footprint=HDR,2x20,2M54,STRT,UNSHROUD
J11: library part Hdr_M_2X15_2M54_STRT_UNSHROUDED, "Hdr, Male,2x15, 0.1\"x0.1\", Strt,Mate Ht 0.318\",Tail Ht 0.120\",Unshrouded", Manufacturer 1=Sullins, Manufacturer Part Number 1=PRPC015DFAN-RC
J12: "Hdr,Male,2x10,1.27mm,Strt,Keyed,Cortex-JTAG", Manufacturer 1=Samtec, Manufacturer Part Number 1=FTSH-110-01-L-DV-007-K, PCB_Footprint=FTSH-110-01-X-DV-007-K
J13: "Hdr,Male,2x5,1.27mm,Strt,Keyed,Cortex-JTAG", Manufacturer 1=Samtec, Manufacturer Part Number 1=FTSH-105-01-L-DV-007-K, PCB_Footprint=FTSH-105-01-L-DV-007-K
J14: library part Hdr_M_1X4_2M54_STRT_UNSHROUD, "Hdr, 0.025\" SQ Post Header, Thru-hole, Vertical, 2.54 mm Pitch, 4-Pin, Male, RoHS", Manufacturer=Samtec, Manufacturer Part Number 1=TSW-104-07-G-S, Temperature Range="-55 to 125 degC", ComponentLink1Description="Manufacturer URL", ComponentLink1URL=http://www.samtec.com, ComponentLink2Description=Datasheet, ComponentLink2URL=http://www.samtec.com/documents/webfiles/pdf/TSW_TH.PDF, ComponentLink3Description="Package Specification", ComponentLink3URL=http://www.samtec.com/documents/webfiles/cpdf/TSW-XXX-XX-XXX-X-XX-XXX-MKT.pdf, DatasheetVersion=F-214, Manufacturer 1=Samtec, Mounting Technology=Through-hole, Orientation=Vertical, PackageDescription=".025[0.64] SQ. Post Terminal Strip Assembly", PackageVersion="DM, 8/1988", Pitch="2.54 mm", RoHS=True
J15 JP3 JP6 JP7: library part Hdr_M_1X3_2M54_STRT_UNSHROUD, "DNI,Hdr, 0.025\" SQ Post Header, Through-hole, Vertical, -55 to 125 degC, 2.54 mm Pitch, 3-Pin, Male, RoHS", Manufacturer=Samtec, Manufacturer 2=Sullins, Manufacturer 3=3M, Manufacturer Part Number 2=PRPC003SAAN-RC, Manufacturer Part Number 3=929647-01-03-I, Temperature Range="-55 to 125 degC", ComponentLink1Description="Manufacturer URL", ComponentLink1URL=http://www.samtec.com, ComponentLink2Description=Datasheet, ComponentLink2URL=http://www.samtec.com/documents/webfiles/pdf/TSW_TH.PDF, ComponentLink3Description="Package Specification", ComponentLink3URL=http://www.samtec.com/documents/webfiles/cpdf/TSW-XXX-XX-XXX-X-XX-XXX-MKT.pdf, DatasheetVersion=F-214, Manufacturer 1=Samtec, Manufacturer Part Number 1=TSW-103-07-G-S, Mounting Technology=Through-hole, Orientation=Vertical, PackageDescription=".025[0.64] SQ. Post Terminal Strip Assembly", PackageReference=TSW-103-07-X-S, PackageVersion="DM, 8/1988", PartNumber=TSW-103-07-G-S, Pitch="2.54 mm", RoHS=True
J16: library part Conn_FFC_BOT_SLIDEorLOCK_0.50_20pin, "Conn,FlatFlex,20 pin,0.50mm,bottom-entry,slide-flap,SMT", Manufacturer 1=HiRose, Manufacturer 3=Molex, Manufacturer Part Number 2=FH52-20S-0.5SH(99), Manufacturer Part Number 3=5051102091, Copyright="Copyright (C) 2022 Ultra Librarian. All rights reserved.", Manufacturer 2=HiRose, Manufacturer Part Number 1=FH52-20S-0.5SH, RefDes=RefDes, Type=DEV
J17: library part Conn_FFC_BOT_SLIDorLOCK_0.50_8pin, "Conn,FlatFlex,8 pin,0.50mm,bottom-entry,slide-flap,SMT", Manufacturer 1=HiRose, Manufacturer Part Number 1=FH52E-8S-0.5SH(99), Manufacturer Part Number 2=FH52-8S-0.5SH(99), Mfr_Name=Omron, Copyright="Copyright (C) 2022 Ultra Librarian. All rights reserved.", Manufacturer 2=HiRose, RefDes=RefDes, Type=DEV
J19 J20: "Hdr,Female,1x8,2.54mm,Strt,Unshrouded", Manufacturer 1=Sullins, Manufacturer Part Number 1=PPPC081LFBN-RC
J21: library part Hdr_M_1X3_2M54_STRT_UNSHROUD, "Hdr, 0.025\" SQ Post Header, Through-hole, Vertical, -55 to 125 degC, 2.54 mm Pitch, 3-Pin, Male, RoHS", Manufacturer=Samtec, Manufacturer 2=Sullins, Manufacturer 3=3M, Manufacturer Part Number 1=TSW-103-07-L-S, Manufacturer Part Number 2=PRPC003SAAN-RC, Manufacturer Part Number 3=929647-01-03-I, Temperature Range="-55 to 125 degC", ComponentLink1Description="Manufacturer URL", ComponentLink1URL=http://www.samtec.com, ComponentLink2Description=Datasheet, ComponentLink2URL=http://www.samtec.com/documents/webfiles/pdf/TSW_TH.PDF, ComponentLink3Description="Package Specification", ComponentLink3URL=http://www.samtec.com/documents/webfiles/cpdf/TSW-XXX-XX-XXX-X-XX-XXX-MKT.pdf, DatasheetVersion=F-214, Manufacturer 1=Samtec, Mounting Technology=Through-hole, Orientation=Vertical, PackageDescription=".025[0.64] SQ. Post Terminal Strip Assembly", PackageVersion="DM, 8/1988", Pitch="2.54 mm", RoHS=True
J22: "Test Point, Array, Alignment Pins, SMT Pad,--not a BOM item--", PCB_Footprint=TC2070-IDC
J23: library part Hdr_M_1X3_2M54_STRT_UNSHROUD, "DNI, Hdr, 0.025\" SQ Post Header, Through-hole, Vertical, -55 to 125 degC, 2.54 mm Pitch, 3-Pin, Male, RoHS", Manufacturer=Samtec, Manufacturer 2=Sullins, Manufacturer 3=3M, Manufacturer Part Number 1=TSW-103-07-L-S, Manufacturer Part Number 2=PRPC003SAAN-RC, Manufacturer Part Number 3=929647-01-03-I, Temperature Range="-55 to 125 degC", ComponentLink1Description="Manufacturer URL", ComponentLink1URL=http://www.samtec.com, ComponentLink2Description=Datasheet, ComponentLink2URL=http://www.samtec.com/documents/webfiles/pdf/TSW_TH.PDF, ComponentLink3Description="Package Specification", ComponentLink3URL=http://www.samtec.com/documents/webfiles/cpdf/TSW-XXX-XX-XXX-X-XX-XXX-MKT.pdf, DatasheetVersion=F-214, Manufacturer 1=Samtec, Mounting Technology=Through-hole, Orientation=Vertical, PackageDescription=".025[0.64] SQ. Post Terminal Strip Assembly", PackageVersion="DM, 8/1988", Pitch="2.54 mm", RoHS=True
JP1 JP2 JP4 JP5: library part Hdr_M_1X2_2M54_STRT_UNSHROUD, "DNI,Hdr, 0.025\" SQ Post Header, Through-hole, Vertical, -55 to 125 degC, 2.54 mm Pitch, 2-Pin, Male, RoHS", Manufacturer=Samtec, Manufacturer 2=Amphenol, Manufacturer Part Number 1=TSW-102-07-L-S, Manufacturer Part Number 2=77311-102-02LF, Temperature Range="-55 to 125 degC", ComponentLink1Description="Manufacturer URL", ComponentLink1URL=http://www.samtec.com, ComponentLink2Description=Datasheet, ComponentLink2URL=http://www.samtec.com/documents/webfiles/pdf/TSW_TH.PDF, ComponentLink3Description="Package Specification", ComponentLink3URL=http://www.samtec.com/documents/webfiles/cpdf/TSW-XXX-XX-XXX-X-XX-XXX-MKT.pdf, DatasheetVersion=F-214, Manufacturer 1=Samtec, Mounting Technology=Through-hole, Orientation=Vertical, PackageDescription=".025[0.64] SQ. Post Terminal Strip Assembly", PackageVersion="DM, 8/1988", Pitch="2.54 mm", RoHS=True
JP9: library part Hdr_M_2X3_2M54_STRT_UNSHROUDED, "Hdr, Male,2x3, 2.54mm,0.230mate,0.100-0.120post,, Strt", Manufacturer 1=Samtec, Manufacturer Part Number 1=TSW-103-07-L-D
L1 L7: "Ind,Unshielded,8.2nH,<5%,1.5A,<70mOhm, SRF > 4GHz, 0402", Manufacturer 1=Delta, Manufacturer 2=MuRata, Manufacturer 3=CoilCraft, Manufacturer Part Number 1=0402HP-8N2EGTS, Manufacturer Part Number 2=LQW15AN8N2G80D, Manufacturer Part Number 3=0402DC-8N2XGRW, RMS_Current=1A5, Tolerance=5%, Code_IEC=0402, Code_JEITA=0402, DCR=70m, LatestRevisionDate=29-May-2009, LatestRevisionNote="IPC-7351 Footprint Added.", Max_Height=0.70mm, PackageDescription="Chip Inductor", PackageReference=0402, PCB_Footprint=0402, Published=8-Jun-2000, Publisher="Altium Limited"
L2: "Ind,Shielded,Metal Comp,2.2uH,20%,1.8A,<140mOhm,0806(2016)", Manufacturer 1=Samsung, Manufacturer 2=Littlefuse, Manufacturer Part Number 1=CIGT201610LH2R2MNE, Manufacturer Part Number 2=LPWI201610H2R2T, RMS_Current=1A8, Tolerance=20%, Code_IEC=2520, Code_JEITA=2520, DCR=140m, LatestRevisionDate=29-May-2009, LatestRevisionNote="IPC-7351 Footprint Added.", Max_Height=0.60mm, PackageDescription="Chip Inductor", PackageReference=L1008, PCB_Footprint=0806, Published=8-Jun-2000, Publisher="Altium Limited"
L3: "Ind,2.3nH,+-0.1nH,>500mA,ESR < 250mOhm,SRF >7GHz,Q >20 @ 500MHz,0201", Manufacturer 1=MuRata, Manufacturer 2=TDK, Manufacturer Part Number 1=LQP03HQ2N3B02D, Manufacturer Part Number 2=MHQ0603P2N3BT000, RMS_Current=500mA, Tolerance=0n1, Code_IEC=0201, Code_JEITA=0201, DCR=170m, LatestRevisionDate=29-May-2009, LatestRevisionNote="IPC-7351 Footprint Added.", Max_Height=0.45mm, PackageDescription="Chip Inductor", PackageReference=0402-A, PCB_Footprint=0201, Published=8-Jun-2000, Publisher="Altium Limited"
L4 R52: "Res,0R ohm,Jumper,0201", Manufacturer 1=KOA, Manufacturer 2=Stackpol, Manufacturer 3=Panasonic, Manufacturer Part Number 1=RK73Z1HTTC, Manufacturer Part Number 2=RMCF0201ZT0R00, Manufacturer Part Number 3=ERJ-1GN0R00C, Tolerance=1%, LatestRevisionDate=29-May-2009, LatestRevisionNote="IPC-7351 Footprint Added.", PackageDescription="Chip Resistor", PackageReference=0201, PCB_Footprint=0201, Published=8-Jun-2000, Publisher="Altium Limited", Type="Thick Film", Wattage=50mW
L5: library part Cap_SMT, "Cap,1.2pF,<+-0.10pF,25-50V,C0G,0201", Manufacturer 1=MuRata, Manufacturer 2=Kemet, Manufacturer 3=Kyosera, Manufacturer Part Number 1=GJM0335C1E1R2BB01D, Manufacturer Part Number 2=CBR02C129B3GAC, Manufacturer Part Number 3=CU01311R2BAT2A, Tolerance=0p1, Voltage=50V, LatestRevisionDate=17-Jul-2002, LatestRevisionNote="Re-released for DXP Platform.", Max_Height=0.60mm, PackageDescription="Radial Cap, Thru-Hole; 2 Leads; 0.3 in Pin Spacing", PackageReference=RAD-0.3, PCB_Footprint=0201, Published=8-Jun-2000, Publisher="Altium Limited", Type=C0G
L6: "Ind,Shielded,4.7uH,20%,1.7A,900mOhm,4x4x2mm", Manufacturer 1=Vishay, Manufacturer 2=Yageo, Manufacturer 3=Abracon, Manufacturer Part Number 1=IFSC1515AHER4R7M01, Manufacturer Part Number 2=BWVS004040184R7M00, Manufacturer Part Number 3=ASPI-0418FS-4R7-T3, RMS_Current=1A7, Tolerance=20%, Code_IEC=4x4x2mm, Code_JEITA=4x4x2mm, DCR=90m, LatestRevisionDate=29-May-2009, LatestRevisionNote="IPC-7351 Footprint Added.", Max_Height=0.60mm, PackageDescription=4x4x2mm, PackageReference=4x4x2mm, PCB_Footprint=4x4x2mm, Published=8-Jun-2000, Publisher="Altium Limited"
L8: "Ind,Unshielded,2.2uH,20%,2.3A,85mOhm,1008(2520)", Manufacturer 1=MuRata, Manufacturer 2="Pulse Eng", Manufacturer 3=Vishay, Manufacturer Part Number 1=DFE252012F-2R2M=P2, Manufacturer Part Number 2=BDHE002520122R2MQ1, Manufacturer Part Number 3=IHHP1008ABER2R2M01, RMS_Current=2.3A, Tolerance=20%, Code_IEC=2520, Code_JEITA=2520, DCR=85m, LatestRevisionDate=29-May-2009, LatestRevisionNote="IPC-7351 Footprint Added.", Max_Height=0.60mm, PackageDescription="Chip Inductor", PackageReference=L1008, PCB_Footprint=L1008, Published=8-Jun-2000, Publisher="Altium Limited"
PD1 PD2: library part PAD_0101, "Test Point, SMT Pad,--not a BOM item--", PCB_Footprint=TP_PAD10x10
Q1 Q2 Q3 Q4 Q5 Q6 Q7 Q8: "MOSFET,N-CH,20V,250mA,1.1Ohm,SOT-23", Manufacturer 1=Toshiba, Manufacturer 2=Rohm, Manufacturer Part Number 1=SSM3K35AFS, Manufacturer Part Number 2=RUE002N02TL, ComponentLink1Description="Manufacturer Link", ComponentLink1URL=http://www.irf.com/, DatasheetVersion=PD-9.814, LatestRevisionDate=17-Jul-2002, LatestRevisionNote="Re-released for DXP Platform.", Note="Pin 2 is electrically connected to pin 4.", PackageDescription="TO, Thru-Hole, Vertical, Heatsink Mounted; 3 In-Line Leads; Pitch 2.54 mm", PackageReference=TO-220AB, PackageVersion=Feb-1997, Published=8-Jun-2000, Publisher="Altium Limited"
R1 R3: "Res,3K57,1%,100ppm,0402", Manufacturer 1=Stackpol, Manufacturer 2=Yageo, Manufacturer Part Number 1=RMCF0402FT3K57, Manufacturer Part Number 2=RC0402FR-073K57L, Tolerance=1%, LatestRevisionDate=29-May-2009, LatestRevisionNote="IPC-7351 Footprint Added.", PackageDescription="Chip Resistor", PackageReference=RESC0402-01, PCB_Footprint=RESC0402-01, Published=8-Jun-2000, Publisher="Altium Limited", Type="Thick Film", Wattage=63mW
R2: "Res,1K15,1%,100ppm,0402", Manufacturer 1=Stackpol, Manufacturer 2=Yageo, Manufacturer 3=Bourns, Manufacturer Part Number 1=RMCF0402FT1K15, Manufacturer Part Number 2=RC0402FR-071K15L, Manufacturer Part Number 3=CR0402-FX-1151GLF, Tolerance=1%, LatestRevisionDate=29-May-2009, LatestRevisionNote="IPC-7351 Footprint Added.", PackageDescription="Chip Resistor", PackageReference=RESC0402-01, PCB_Footprint=RESC0402-01, Published=8-Jun-2000, Publisher="Altium Limited", Type="Thick Film", Wattage=63mW
R4: "Res,2K87,1%,100ppm,0402", Manufacturer 1=Stackpol, Manufacturer 2=Yageo, Manufacturer 3=Bourns, Manufacturer Part Number 1=RMCF0402FT2K87, Manufacturer Part Number 2=RC0402FR-072K87L, Manufacturer Part Number 3=CR0402-FX-2871GLF, Tolerance=1%, LatestRevisionDate=29-May-2009, LatestRevisionNote="IPC-7351 Footprint Added.", PackageDescription="Chip Resistor", PackageReference=RESC0402-01, PCB_Footprint=RESC0402-01, Published=8-Jun-2000, Publisher="Altium Limited", Type="Thick Film", Wattage=63mW
R5 R6 R16 R37 R58 R79 R101 R102 S6: "Res,0R ohm,Jumper,0402", Manufacturer 1=Stackpol, Manufacturer 2=Yageo, Manufacturer 3=Panasonic, Manufacturer Part Number 1=RMCF0402ZT0R00, Manufacturer Part Number 2=RC0402FR-070RL, Manufacturer Part Number 3=ERJ-XGN0R00Y, Tolerance=JMPR, LatestRevisionDate=29-May-2009, LatestRevisionNote="IPC-7351 Footprint Added.", PackageDescription="Chip Resistor", PackageReference=RESC0402-01, PCB_Footprint=RESC0402-01, Published=8-Jun-2000, Publisher="Altium Limited", Type="Thick Film", Wattage=63mW
R7 R14 R77 R78 R83 R84 R93: "Res,1K82,1%,100ppm,0402", Manufacturer 1=Stackpol, Manufacturer 2=Yageo, Manufacturer 3=Bourns, Manufacturer Part Number 1=RMCF0402FT1K82, Manufacturer Part Number 2=RC0402FR-071K82L, Manufacturer Part Number 3=CR0402-FX-1821GLF, Tolerance=1%, LatestRevisionDate=29-May-2009, LatestRevisionNote="IPC-7351 Footprint Added.", PackageDescription="Chip Resistor", PackageReference=RESC0402-01, PCB_Footprint=RESC0402-01, Published=8-Jun-2000, Publisher="Altium Limited", Type="Thick Film", Wattage=63mW
R8 R9 R65 R66 R67 R68 R87: "DNI,Res,0R ohm,Jumper,0402", Manufacturer 1=Stackpol, Manufacturer 2=Yageo, Manufacturer 3=Panasonic, Manufacturer Part Number 1=RMCF0402ZT0R00, Manufacturer Part Number 2=RC0402FR-070RL, Manufacturer Part Number 3=ERJ-XGN0R00Y, Tolerance=JMPR, LatestRevisionDate=29-May-2009, LatestRevisionNote="IPC-7351 Footprint Added.", PackageDescription="Chip Resistor", PackageReference=RESC0402-01, PCB_Footprint=RESC0402-01, Published=8-Jun-2000, Publisher="Altium Limited", Type="Thick Film", Wattage=63mW
R10 R22 R85: "Res,1K00,1%,100ppm,0402", Manufacturer 1=Stackpol, Manufacturer 2=Yageo, Manufacturer 3=Bourns, Manufacturer Part Number 1=RMCF0402FT1K, Manufacturer Part Number 2=RC0402FR-071KL, Manufacturer Part Number 3=CR0402-FX-1001GLF, Tolerance=1%, LatestRevisionDate=29-May-2009, LatestRevisionNote="IPC-7351 Footprint Added.", PackageDescription="Chip Resistor", PackageReference=RESC0402-01, PCB_Footprint=RESC0402-01, Published=8-Jun-2000, Publisher="Altium Limited", Type="Thick Film", Wattage=63mW
R11 R13 R15 R29 R30 R46 R49 R54 R59 R75 R81 R82 R91 R92 R95 R97 R98: "Res,100K,1%,100ppm,0402", Manufacturer 1=Stackpol, Manufacturer 2=Yageo, Manufacturer 3=Bourns, Manufacturer Part Number 1=RMCF0402FT100K, Manufacturer Part Number 2=RC0402FR-07100KL, Manufacturer Part Number 3=CR0402-FX-1003GLF, Tolerance=1%, LatestRevisionDate=29-May-2009, LatestRevisionNote="IPC-7351 Footprint Added.", PackageDescription="Chip Resistor", PackageReference=RESC0402-01, PCB_Footprint=RESC0402-01, Published=8-Jun-2000, Publisher="Altium Limited", Type="Thick Film", Wattage=63mW
R12 R96: "Res,681R,1%,100ppm,0402", Manufacturer 1=Stackpol, Manufacturer 2=Yageo, Manufacturer 3=Bourns, Manufacturer Part Number 1=RMCF0402FT681R, Manufacturer Part Number 2=RC0402FR-07681RL, Manufacturer Part Number 3=CR0402-FX-6810GLF, Tolerance=1%, LatestRevisionDate=29-May-2009, LatestRevisionNote="IPC-7351 Footprint Added.", PackageDescription="Chip Resistor", PackageReference=RESC0402-01, PCB_Footprint=RESC0402-01, Published=8-Jun-2000, Publisher="Altium Limited", Type="Thick Film", Wattage=63mW
R17: "Res,1R00,1%,100ppm,0402", Manufacturer 1=Vishay, Manufacturer 2=KOA, Manufacturer 3=Stackpol, Manufacturer Part Number 1=CRCW04021R00FKED, Manufacturer Part Number 2=RK73H1ETTP1R00F, Manufacturer Part Number 3=RMCF0402FT1R00, Tolerance=1%, LatestRevisionDate=29-May-2009, LatestRevisionNote="IPC-7351 Footprint Added.", PackageDescription="Chip Resistor", PackageReference=RESC0402-01, PCB_Footprint=RESC0402-01, Published=8-Jun-2000, Publisher="Altium Limited", Type="Thick Film", Wattage=63mW
R18 R19 R20 R21 R62 R63 R72 R73 R74: "Res,5K11,1%,100ppm,0402", Manufacturer 1=KOA, Manufacturer 2=Yageo, Manufacturer 3=Bourns, Manufacturer Part Number 1=RK73H1ETTP5111F, Manufacturer Part Number 2=RC0402FR-075K11L, Manufacturer Part Number 3=CR0402-FX-5111GLF, Tolerance=1%, LatestRevisionDate=29-May-2009, LatestRevisionNote="IPC-7351 Footprint Added.", PackageDescription="Chip Resistor", PackageReference=RESC0402-01, PCB_Footprint=RESC0402-01, Published=8-Jun-2000, Publisher="Altium Limited", Type="Thick Film", Wattage=63mW
R24: "Res,1M00,1%,100ppm,0402", Manufacturer 1=Stackpol, Manufacturer 2=Yageo, Manufacturer 3=Bourns, Manufacturer Part Number 1=RMCF0402FT1M00, Manufacturer Part Number 2=RC0402FR-071ML, Manufacturer Part Number 3=CR0402-FX-1004GLF, Tolerance=1%, LatestRevisionDate=29-May-2009, LatestRevisionNote="IPC-7351 Footprint Added.", PackageDescription="Chip Resistor", PackageReference=RESC0402-01, PCB_Footprint=RESC0402-01, Published=8-Jun-2000, Publisher="Altium Limited", Type="Thick Film", Wattage=63mW
R25 R48 R51 R88 R94 R103: "Res,20K0,1%,100ppm,0402", Manufacturer 1=Stackpol, Manufacturer 2=Yageo, Manufacturer 3=Bourns, Manufacturer Part Number 1=RMCF0402FT20K0, Manufacturer Part Number 2=RC0402FR-0720KL, Manufacturer Part Number 3=CR0402-FX-2002GLF, Tolerance=1%, LatestRevisionDate=29-May-2009, LatestRevisionNote="IPC-7351 Footprint Added.", PackageDescription="Chip Resistor", PackageReference=RESC0402-01, PCB_Footprint=RESC0402-01, Published=8-Jun-2000, Publisher="Altium Limited", Type="Thick Film", Wattage=63mW
R26 R69 R89: "DNI,Res,10K0,1%,100ppm,0402", Manufacturer 1=Stackpol, Manufacturer 2=Yageo, Manufacturer 3=Bourns, Manufacturer Part Number 1=RMCF0402FT10K0, Manufacturer Part Number 2=RC0402FR-0710KL, Manufacturer Part Number 3=CR0402-FX-1002GLF, Tolerance=1%, LatestRevisionDate=29-May-2009, LatestRevisionNote="IPC-7351 Footprint Added.", PackageDescription="Chip Resistor", PackageReference=RESC0402-01, PCB_Footprint=RESC0402-01, Published=8-Jun-2000, Publisher="Altium Limited", Type="Thick Film", Wattage=63mW
R27 R28 R90: "Res,200R,1%,100ppm,0402", Manufacturer 1=Stackpol, Manufacturer 2=Yageo, Manufacturer 3=Bourns, Manufacturer Part Number 1=RMCF0402FT220R, Manufacturer Part Number 2=RC0402FR-07200RL, Manufacturer Part Number 3=CR0402-FX-2000GLF, Tolerance=1%, LatestRevisionDate=29-May-2009, LatestRevisionNote="IPC-7351 Footprint Added.", PackageDescription="Chip Resistor", PackageReference=RESC0402-01, PCB_Footprint=RESC0402-01, Published=8-Jun-2000, Publisher="Altium Limited", Type="Thick Film", Wattage=63mW
R31 R32 R35 R36: "DNI,Res,100K,1%,100ppm,0402", Manufacturer 1=Stackpol, Manufacturer 2=Yageo, Manufacturer 3=Bourns, Manufacturer Part Number 1=RMCF0402FT100K, Manufacturer Part Number 2=RC0402FR-07100KL, Manufacturer Part Number 3=CR0402-FX-1003GLF, Tolerance=1%, LatestRevisionDate=29-May-2009, LatestRevisionNote="IPC-7351 Footprint Added.", PackageDescription="Chip Resistor", PackageReference=RESC0402-01, PCB_Footprint=RESC0402-01, Published=8-Jun-2000, Publisher="Altium Limited", Type="Thick Film", Wattage=63mW
R33 R34 R40 R45 R47 R61 R64: "Res,10K0,1%,100ppm,0402", Manufacturer 1=Stackpol, Manufacturer 2=Yageo, Manufacturer 3=Bourns, Manufacturer Part Number 1=RMCF0402FT10K0, Manufacturer Part Number 2=RC0402FR-0710KL, Manufacturer Part Number 3=CR0402-FX-1002GLF, Tolerance=1%, LatestRevisionDate=29-May-2009, LatestRevisionNote="IPC-7351 Footprint Added.", PackageDescription="Chip Resistor", PackageReference=RESC0402-01, Published=8-Jun-2000, Publisher="Altium Limited", Type="Thick Film", Wattage=63mW
  R33 R34 R61 R64: PCB_Footprint=RESC0402-01
  R40 R45 R47: PCB_Footprint=R0402